# Altium PCB ALL.pcbdoc
Units mil, origin at the board's own origin, x right, y up, seen from the top; angles counter-clockwise.
Board outline 10852.5 x 10852.5 mil, 2 copper layers (Top Layer, Bottom Layer); 11 components, 199 nets, 351 pads, 0 vias.
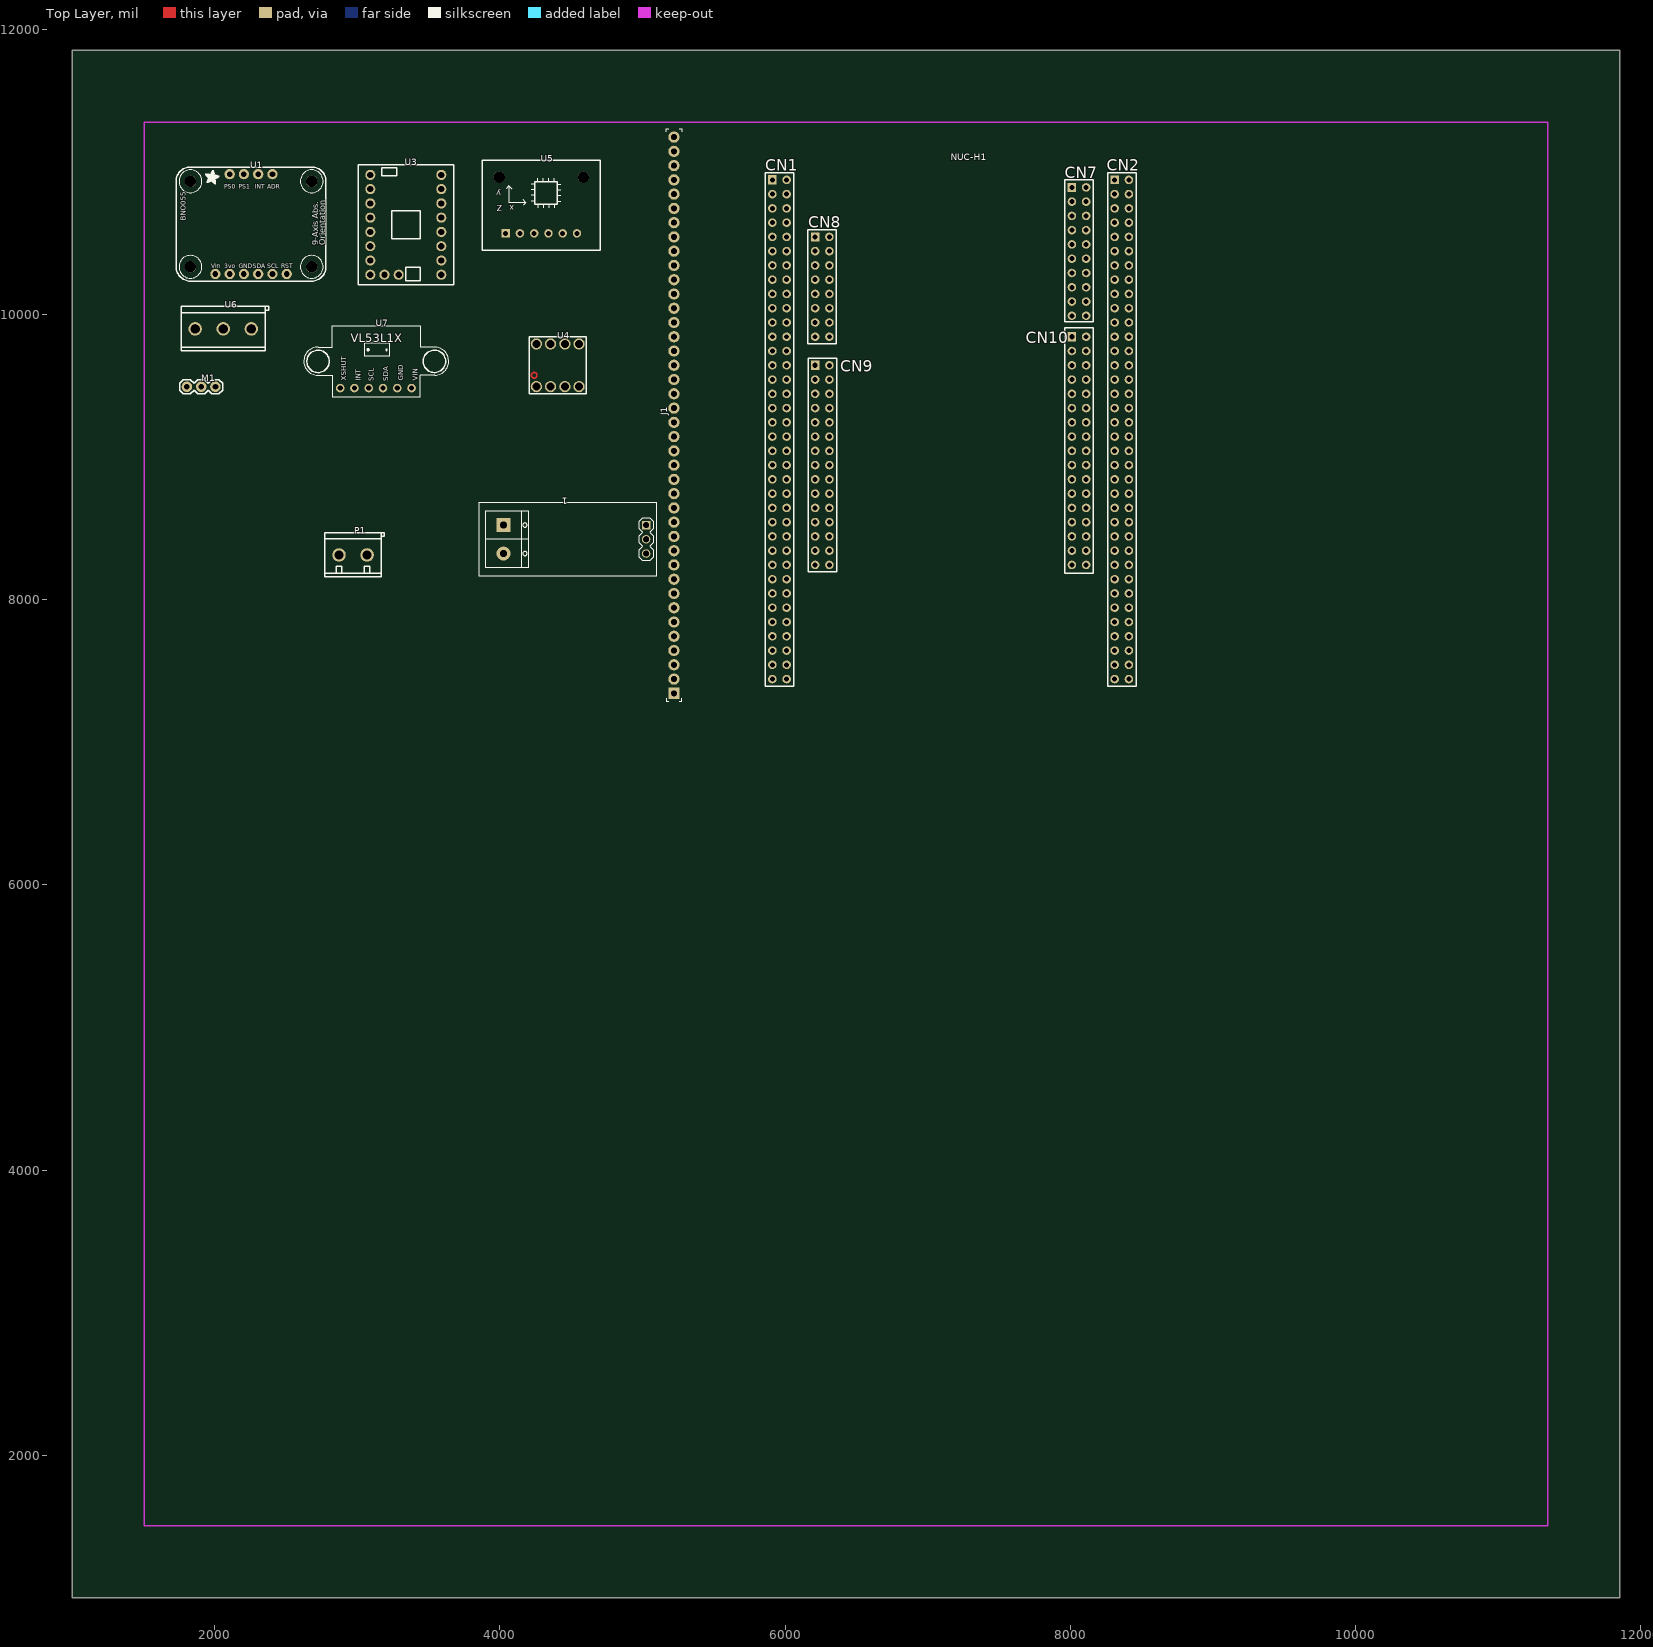
[diagram p0: Top Layer view]
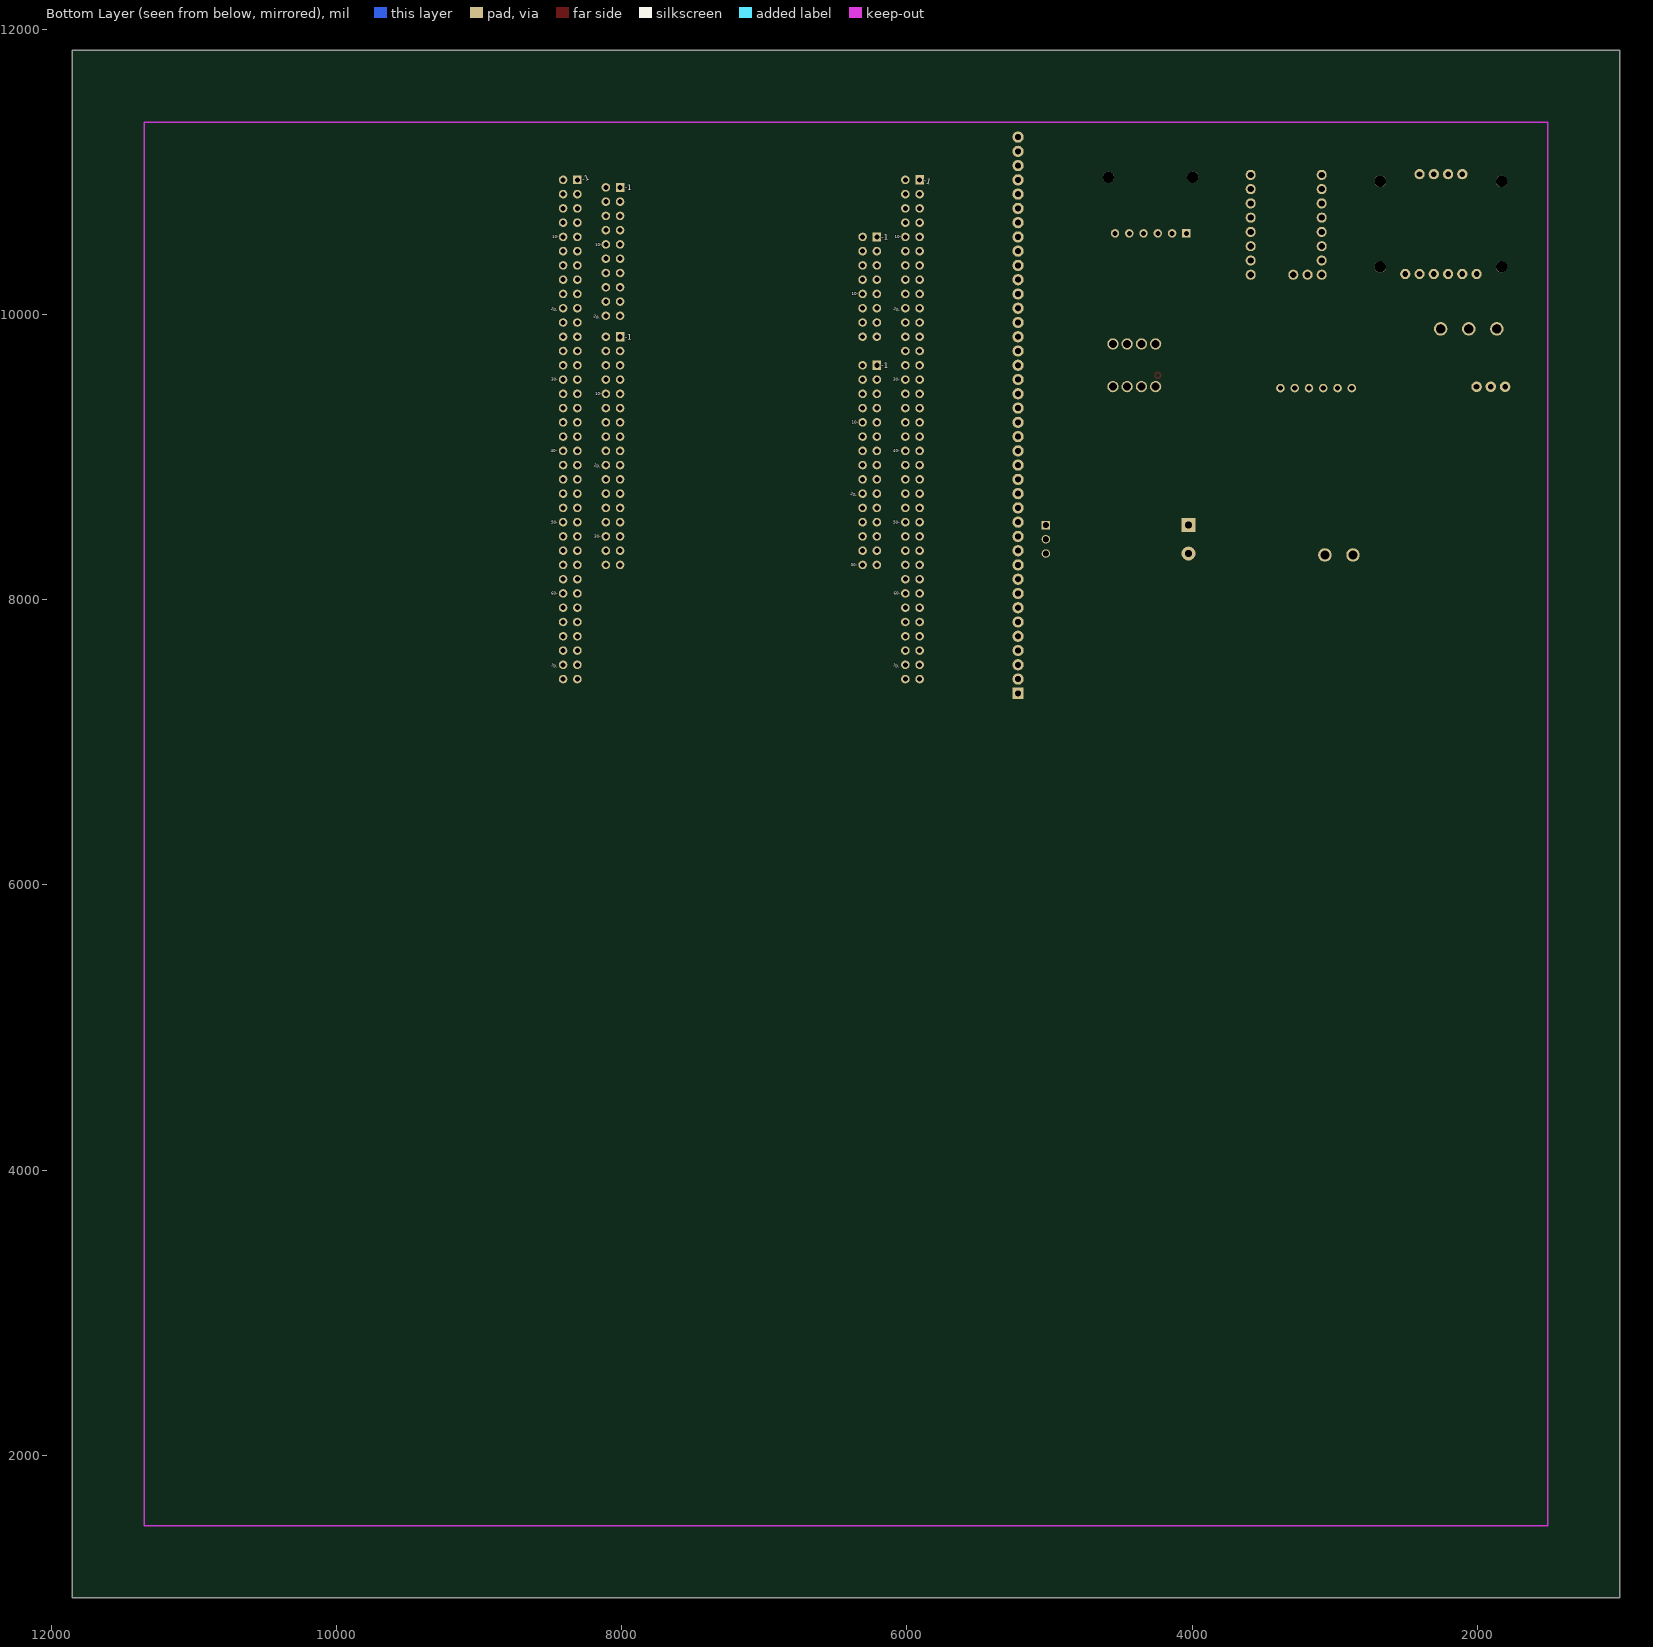
[diagram p1: Bottom Layer view, seen from below]

## Layer stack, top to bottom
Top Layer: signal copper (thickness not stored)
Dielectric: dielectric 12.6, FR-4, Dk 4.8
Bottom Layer: signal copper (thickness not stored)

## Board outline
11852.5,1000 1000,1000 1000,11852.5 11852.5,11852.5

## Components (designator, comment, footprint, x,y, rotation, side; value= is the part's Value field where it differs from the comment)
1 "CURRENT-SENSOR-ACS712#IC" CURRENT-SENSOR-ACS712#IC 4475,8422.5 r0 top
J1 "PRPC040SAAN-RC" PINHEADER_1X40_P2.54_DRILL1MM 5220,7342.5 r90 top
M1 "SMALL_SERVO" 1X03 1805,9492.5 r0 top
NUC-H1 "NUCLEO-H755ZI-ZIO" NUCLEO-H7 5910,9242.5 r0 top
P1 "KF126-5.0-2P" CONN-TH_P5.00_KF126-5.0-2P 2970,8312.5 r0 top
U1 "BNO055 MODIFIED" BNO055 2280,10727.5 r0 top
U3 "TMC2209 Socket" COMM-TH_TMC2209SILENTSTEPSTICK 3340.02,10627.5 r0 top
U4 "8 PIN DIP SOCKET" "DIP 8 PIN SOCKET" 4405,9642.5 r0 top
U5 "MPU6050-TH COPY" COMM-TH_MPU6050-TH 4290,10567.5 r0 top
U6 "Limit Switch" CONN-TH_3P-P5.00_KF126-5.0-3P 2060,9897.5 r0 top
U7 "VL53L1X_BREAKOUT COPY" VL53L1X_BREAKOUT 2880,9482.5 r0 top

## Footprints (in the part's own frame and the unit in brackets; to place one, negate y for a bottom-side part, rotate by r counter-clockwise, add the part's x,y. Pads: shape width x height; smd on the part's side, far side on the other; paste and mask are expansions set on the pad)
1X03 [mil]
  round 74 hole 40 paste+0 mask+2: 1(0,0) 2(100,0) 3(200,0)
  silkscreen extent -50,-50 250,50
BNO055 [mil]
  round 72 hole 39.36 paste+0 mask+4: 3vo(-175,-445) ADR(125,255) GND(-75,-445) INT(25,255) PS0(-175,255) PS1(-75,255) RST(225,-445) SCL(125,-445) SDA(25,-445) Vin(-275,-445)
  round 80 hole 80 unplated paste+0: ""(-450,-395) ""(-450,205) ""(400,-395) ""(400,205)
  silkscreen extent -550,-495 500,305
COMM-TH_MPU6050-TH [mm]
  rect 1.5x1.5 hole 0.9 paste+0 mask+0.05: 1(-6.35,0.001)
  round 1.5 hole 0.9 paste+0 mask+0.05: 2(-3.81,0) 3(-1.27,0) 4(1.27,0) 5(3.81,0) 6(6.35,0)
  round 2 hole 2 unplated paste+0: ""(-7.5,10) ""(7.5,10)
  silkscreen extent -10.5,-3 10.5,13
COMM-TH_TMC2209SILENTSTEPSTICK [mm]
  round 1.8 hole 1.1 paste+0 mask+0.051: 1(6.32,8.89) 2(6.32,6.35) 3(6.32,3.81) 4(6.32,1.27) 5(6.32,-1.27) 6(6.32,-3.81) 7(6.32,-6.35) 8(6.32,-8.89) 9(-6.32,8.89) 10(-6.32,6.35) 11(-6.32,3.81) 12(-6.32,1.27) 13(-6.32,-1.27) 14(-6.32,-3.81) 15(-6.32,-6.35) 16(-6.32,-8.89) 17(-3.81,-8.89) 18(-1.27,-8.89)
  silkscreen extent -8.5,-10.7 8.5,10.7
CONN-TH_3P-P5.00_KF126-5.0-3P [mm]
  round 2.4 hole 1.6 slot 1.605 at 0 deg paste+0 mask+0.051: 1(-5,0) 2(0,0) 3(5,0)
  silkscreen extent -7.5,-3.9 8.09,4
CONN-TH_P5.00_KF126-5.0-2P [mm]
  round 2.4 hole 1.6 paste+0 mask+0.102: 1(-2.5,0) 2(2.5,0)
  silkscreen extent -5,-3.9 5.59,4
CURRENT-SENSOR-ACS712#IC [mil]
  rect 59.37x59.37 hole 39.36 paste+0 mask+2: 1(550,100)
  round 59.37 hole 39.36 paste+0 mask+2: 2(550,0) 3(550,-100)
  rect 98.42x98.42 hole 47.24 slot 47.44 at 0 deg paste+0 mask+2: P1.1(-450,100)
  round 98.42 hole 47.24 slot 47.44 at 0 deg paste+0 mask+2: P1.2(-450,-100)
  silkscreen extent -620,-260 620,260
"DIP 8 PIN SOCKET" [mm]
  round 2 hole 1.4 paste+0 mask+0.102: 1(-3.81,-3.81) 2(-1.27,-3.81) 3(1.27,-3.81) 4(3.81,-3.81) 5(3.81,3.81) 6(1.27,3.81) 7(-1.27,3.81) 8(-3.81,3.81)
  Top Layer circle w0.254: c-4.191,-1.778 r0.5
  silkscreen extent -5.08,-5.08 5.08,5.08
NUCLEO-H7 [mm]
  rect 1.52x1.65 hole 0.914 paste+0 mask+0.051: 1(0,43.18) 145(7.62,33.02) 161(7.62,10.16) 191(53.34,41.834) 211(53.34,15.24)
  round 1.52 hole 0.89 paste+0 mask+0.051: 2(2.54,43.18) 3(0,40.64) 4(2.54,40.64) 5(0,38.1) 6(2.54,38.1) 7(0,35.56) 8(2.54,35.56) 9(0,33.02) 10(2.54,33.02) 11(0,30.48) 12(2.54,30.48) 13(0,27.94) 14(2.54,27.94) 15(0,25.4) 16(2.54,25.4) 17(0,22.86) 18(2.54,22.86) 19(0,20.32) 20(2.54,20.32) 21(0,17.78) 22(2.54,17.78) 23(0,15.24) 24(2.54,15.24) 25(0,12.7) 26(2.54,12.7) 27(0,10.16) 28(2.54,10.16) 29(0,7.62) 30(2.54,7.62) 31(0,5.08) 32(2.54,5.08) 33(0,2.54) 34(2.54,2.54) 35(0,0) 36(2.54,0) 37(0,-2.54) 38(2.54,-2.54) 39(0,-5.08) 40(2.54,-5.08) 41(0,-7.62) 42(2.54,-7.62) 43(0,-10.16) 44(2.54,-10.16) 45(0,-12.7) 46(2.54,-12.7) 47(0,-15.24) 48(2.54,-15.24) 49(0,-17.78) 50(2.54,-17.78) 51(0,-20.32) 52(2.54,-20.32) 53(0,-22.86) 54(2.54,-22.86) 55(0,-25.4) 56(2.54,-25.4) 57(0,-27.94) 58(2.54,-27.94) 59(0,-30.48) 60(2.54,-30.48) 61(0,-33.02) 62(2.54,-33.02) 63(0,-35.56) 64(2.54,-35.56) 65(0,-38.1) 66(2.54,-38.1) 67(0,-40.64) 68(2.54,-40.64) 69(0,-43.18) 70(2.54,-43.18) 71(0,-45.72) 72(2.54,-45.72) 74(63.5,43.18) 75(60.96,40.64) 76(63.5,40.64) 77(60.96,38.1) 78(63.5,38.1) 79(60.96,35.56) 80(63.5,35.56) 81(60.96,33.02) 82(63.5,33.02) 83(60.96,30.48) 84(63.5,30.48) 85(60.96,27.94) 86(63.5,27.94) 87(60.96,25.4) 88(63.5,25.4) 89(60.96,22.86) 90(63.5,22.86) 91(60.96,20.32) 92(63.5,20.32) 93(60.96,17.78) 94(63.5,17.78) 95(60.96,15.24) 96(63.5,15.24) 97(60.96,12.7) 98(63.5,12.7) 99(60.96,10.16) 100(63.5,10.16) 101(60.96,7.62) 102(63.5,7.62) 103(60.96,5.08) 104(63.5,5.08) 105(60.96,2.54) 106(63.5,2.54) 107(60.96,0) 108(63.5,0) 109(60.96,-2.54) 110(63.5,-2.54) 111(60.96,-5.08) 112(63.5,-5.08) 113(60.96,-7.62) 114(63.5,-7.62) 115(60.96,-10.16) 116(63.5,-10.16) 117(60.96,-12.7) 118(63.5,-12.7) 119(60.96,-15.24) 120(63.5,-15.24) 121(60.96,-17.78) 122(63.5,-17.78) 123(60.96,-20.32) 124(63.5,-20.32) 125(60.96,-22.86) 126(63.5,-22.86) 127(60.96,-25.4) 128(63.5,-25.4) 129(60.96,-27.94) 130(63.5,-27.94) 131(60.96,-30.48) 132(63.5,-30.48) 133(60.96,-33.02) 134(63.5,-33.02) 135(60.96,-35.56) 136(63.5,-35.56) 137(60.96,-38.1) 138(63.5,-38.1) 139(60.96,-40.64) 140(63.5,-40.64) 141(60.96,-43.18) 142(63.5,-43.18) 143(60.96,-45.72) 144(63.5,-45.72) 146(10.16,33.02) 147(7.62,30.48) 148(10.16,30.48) 149(7.62,27.94) 150(10.16,27.94) 151(7.62,25.4) 152(10.16,25.4) 153(7.62,22.86) 154(10.16,22.86) 155(7.62,20.32) 156(10.16,20.32) 157(7.62,17.78) 158(10.16,17.78) 159(7.62,15.24) 160(10.16,15.24) 162(10.16,10.16) 163(7.62,7.62) 164(10.16,7.62) 165(7.62,5.08) 166(10.16,5.08) 167(7.62,2.54) 168(10.16,2.54) 169(7.62,0) 170(10.16,0) 171(7.62,-2.54) 172(10.16,-2.54) 173(7.62,-5.08) 174(10.16,-5.08) 175(7.62,-7.62) 176(10.16,-7.62) 177(7.62,-10.16) 178(10.16,-10.16) 179(7.62,-12.7) 180(10.16,-12.7) 181(7.62,-15.24) 182(10.16,-15.24) 183(7.62,-17.78) 184(10.16,-17.78) 185(7.62,-20.32) 186(10.16,-20.32) 187(7.62,-22.86) 188(10.16,-22.86) 189(7.62,-25.4) 190(10.16,-25.4) 192(55.88,41.834) 193(53.34,39.294) 194(55.88,39.294) 195(53.34,36.754) 196(55.88,36.754) 197(53.34,34.214) 198(55.88,34.214) 199(53.34,31.674) 200(55.88,31.674) 201(53.34,29.134) 202(55.88,29.134) 203(53.34,26.594) 204(55.88,26.594) 205(53.34,24.054) 206(55.88,24.054) 207(53.34,21.514) 208(55.88,21.514) 209(53.34,18.974) 210(55.88,18.974) 212(55.88,15.24) 213(53.34,12.7) 214(55.88,12.7) 215(53.34,10.16) 216(55.88,10.16) 217(53.34,7.62) 218(55.88,7.62) 219(53.34,5.08) 220(55.88,5.08) 221(53.34,2.54) 222(55.88,2.54) 223(53.34,0) 224(55.88,0) 225(53.34,-2.54) 226(55.88,-2.54) 227(53.34,-5.08) 228(55.88,-5.08) 229(53.34,-7.62) 230(55.88,-7.62) 231(53.34,-10.16) 232(55.88,-10.16) 233(53.34,-12.7) 234(55.88,-12.7) 235(53.34,-15.24) 236(55.88,-15.24) 237(53.34,-17.78) 238(55.88,-17.78) 239(53.34,-20.32) 240(55.88,-20.32) 241(53.34,-22.86) 242(55.88,-22.86) 243(53.34,-25.4) 244(55.88,-25.4)
  rect 1.52x1.52 hole 0.89 paste+0 mask+0.051: 73(60.96,43.18)
  silkscreen extent -1.27,-46.99 64.77,44.45
PINHEADER_1X40_P2.54_DRILL1MM [mm]
  rect 2x2 hole 1 paste+0 mask+0.051: 1(0,0)
  round 2 hole 1 paste+0 mask+0.051: 2(2.54,0) 3(5.08,0) 4(7.62,0) 5(10.16,0) 6(12.7,0) 7(15.24,0) 8(17.78,0) 9(20.32,0) 10(22.86,0) 11(25.4,0) 12(27.94,0) 13(30.48,0) 14(33.02,0) 15(35.56,0) 16(38.1,0) 17(40.64,0) 18(43.18,0) 19(45.72,0) 20(48.26,0) 21(50.8,0) 22(53.34,0) 23(55.88,0) 24(58.42,0) 25(60.96,0) 26(63.5,0) 27(66.04,0) 28(68.58,0) 29(71.12,0) 30(73.66,0) 31(76.2,0) 32(78.74,0) 33(81.28,0) 34(83.82,0) 35(86.36,0) 36(88.9,0) 37(91.44,0) 38(93.98,0) 39(96.52,0) 40(99.06,0)
  silkscreen extent -1.4,-1.4 100.5,1.4
VL53L1X_BREAKOUT [mil]
  round 60 hole 36 paste+0 mask+4: 1(0,0) 2(100,0) 3(200,0) 4(300,0) 5(400,0) 6(500,0)
  silkscreen extent -255,-61 760,436

## Nets (pads, with @x,y where several pads share a name; then routed paths per layer and width w, separated by ;. In a path a pad name is that pad's centre, name@x,y a point inside that pad or via, vN(x,y) a via of type N, cw(c..) or ccw(c..) an arc to the next point about the centre after c; other vN are vias at no path point)
1_1: 1.1
1_2: 1.2
1_3: 1.3
1_P1.1: 1.P1.1
1_P1.2: 1.P1.2
J1_1: J1.1
J1_2: J1.2
J1_3: J1.3
J1_4: J1.4
J1_5: J1.5
J1_6: J1.6
J1_7: J1.7
J1_8: J1.8
J1_9: J1.9
J1_10: J1.10
J1_11: J1.11
J1_12: J1.12
J1_13: J1.13
J1_14: J1.14
J1_15: J1.15
J1_16: J1.16
J1_17: J1.17
J1_18: J1.18
J1_19: J1.19
J1_20: J1.20
J1_21: J1.21
J1_22: J1.22
J1_23: J1.23
J1_24: J1.24
J1_25: J1.25
J1_26: J1.26
J1_27: J1.27
J1_28: J1.28
J1_29: J1.29
J1_30: J1.30
J1_31: J1.31
J1_32: J1.32
J1_33: J1.33
J1_34: J1.34
J1_35: J1.35
J1_36: J1.36
J1_37: J1.37
J1_38: J1.38
J1_39: J1.39
J1_40: J1.40
M1_1: M1.1
M1_2: M1.2
M1_3: M1.3
NUC-H1_145: NUC-H1.145
NUC-H1_146: NUC-H1.146
NUC-H1_147: NUC-H1.147
NUC-H1_148: NUC-H1.148
NUC-H1_149: NUC-H1.149
NUC-H1_150: NUC-H1.150
NUC-H1_151: NUC-H1.151
NUC-H1_152: NUC-H1.152
NUC-H1_153: NUC-H1.153
NUC-H1_154: NUC-H1.154
NUC-H1_155: NUC-H1.155
NUC-H1_156: NUC-H1.156
NUC-H1_157: NUC-H1.157
NUC-H1_158: NUC-H1.158
NUC-H1_159: NUC-H1.159
NUC-H1_160: NUC-H1.160
NUC-H1_161: NUC-H1.161
NUC-H1_162: NUC-H1.162
NUC-H1_163: NUC-H1.163
NUC-H1_164: NUC-H1.164
NUC-H1_165: NUC-H1.165
NUC-H1_166: NUC-H1.166
NUC-H1_167: NUC-H1.167
NUC-H1_168: NUC-H1.168
NUC-H1_169: NUC-H1.169
NUC-H1_170: NUC-H1.170
NUC-H1_171: NUC-H1.171
NUC-H1_172: NUC-H1.172
NUC-H1_173: NUC-H1.173
NUC-H1_174: NUC-H1.174
NUC-H1_175: NUC-H1.175
NUC-H1_176: NUC-H1.176
NUC-H1_177: NUC-H1.177
NUC-H1_178: NUC-H1.178
NUC-H1_179: NUC-H1.179
NUC-H1_180: NUC-H1.180
NUC-H1_181: NUC-H1.181
NUC-H1_182: NUC-H1.182
NUC-H1_183: NUC-H1.183
NUC-H1_184: NUC-H1.184
NUC-H1_185: NUC-H1.185
NUC-H1_186: NUC-H1.186
NUC-H1_187: NUC-H1.187
NUC-H1_188: NUC-H1.188
NUC-H1_189: NUC-H1.189
NUC-H1_190: NUC-H1.190
NUC-H1_191: NUC-H1.191
NUC-H1_192: NUC-H1.192
NUC-H1_193: NUC-H1.193
NUC-H1_194: NUC-H1.194
NUC-H1_195: NUC-H1.195
NUC-H1_196: NUC-H1.196
NUC-H1_197: NUC-H1.197
NUC-H1_198: NUC-H1.198
NUC-H1_199: NUC-H1.199
NUC-H1_200: NUC-H1.200
NUC-H1_201: NUC-H1.201
NUC-H1_202: NUC-H1.202
NUC-H1_203: NUC-H1.203
NUC-H1_204: NUC-H1.204
NUC-H1_205: NUC-H1.205
NUC-H1_206: NUC-H1.206
NUC-H1_207: NUC-H1.207
NUC-H1_208: NUC-H1.208
NUC-H1_209: NUC-H1.209
NUC-H1_210: NUC-H1.210
NUC-H1_211: NUC-H1.211
NUC-H1_212: NUC-H1.212
NUC-H1_213: NUC-H1.213
NUC-H1_214: NUC-H1.214
NUC-H1_215: NUC-H1.215
NUC-H1_216: NUC-H1.216
NUC-H1_217: NUC-H1.217
NUC-H1_218: NUC-H1.218
NUC-H1_219: NUC-H1.219
NUC-H1_220: NUC-H1.220
NUC-H1_221: NUC-H1.221
NUC-H1_222: NUC-H1.222
NUC-H1_223: NUC-H1.223
NUC-H1_224: NUC-H1.224
NUC-H1_225: NUC-H1.225
NUC-H1_226: NUC-H1.226
NUC-H1_227: NUC-H1.227
NUC-H1_228: NUC-H1.228
NUC-H1_229: NUC-H1.229
NUC-H1_230: NUC-H1.230
NUC-H1_231: NUC-H1.231
NUC-H1_232: NUC-H1.232
NUC-H1_233: NUC-H1.233
NUC-H1_234: NUC-H1.234
NUC-H1_235: NUC-H1.235
NUC-H1_236: NUC-H1.236
NUC-H1_237: NUC-H1.237
NUC-H1_238: NUC-H1.238
NUC-H1_239: NUC-H1.239
NUC-H1_240: NUC-H1.240
NUC-H1_241: NUC-H1.241
NUC-H1_242: NUC-H1.242
NUC-H1_243: NUC-H1.243
NUC-H1_244: NUC-H1.244
P1_1: P1.1
P1_2: P1.2
U1_3vo: U1.3vo
U1_ADR: U1.ADR
U1_GND: U1.GND
U1_INT: U1.INT
U1_PS0: U1.PS0
U1_PS1: U1.PS1
U1_RST: U1.RST
U1_SCL: U1.SCL
U1_SDA: U1.SDA
U1_Vin: U1.Vin
U3_1: U3.1
U3_2: U3.2
U3_3: U3.3
U3_4: U3.4
U3_5: U3.5
U3_6: U3.6
U3_7: U3.7
U3_8: U3.8
U3_9: U3.9
U3_10: U3.10
U3_11: U3.11
U3_12: U3.12
U3_13: U3.13
U3_14: U3.14
U3_15: U3.15
U3_16: U3.16
U4_1: U4.1
U4_2: U4.2
U4_3: U4.3
U4_4: U4.4
U4_5: U4.5
U4_6: U4.6
U4_7: U4.7
U4_8: U4.8
U5_1: U5.1
U5_2: U5.2
U5_3: U5.3
U5_4: U5.4
U5_5: U5.5
U5_6: U5.6
U6_1: U6.1
U6_2: U6.2
U6_3: U6.3
U7_1: U7.1
U7_2: U7.2
U7_3: U7.3
U7_4: U7.4
U7_5: U7.5
U7_6: U7.6
pads on no net: NUC-H1.1 NUC-H1.2 NUC-H1.3 NUC-H1.4 NUC-H1.5 NUC-H1.6 NUC-H1.7 NUC-H1.8 NUC-H1.9 NUC-H1.10 NUC-H1.11 NUC-H1.12 NUC-H1.13 NUC-H1.14 NUC-H1.15 NUC-H1.16 NUC-H1.17 NUC-H1.18 NUC-H1.19 NUC-H1.20 NUC-H1.21 NUC-H1.22 NUC-H1.23 NUC-H1.24 NUC-H1.25 NUC-H1.26 NUC-H1.27 NUC-H1.28 NUC-H1.29 NUC-H1.30 NUC-H1.31 NUC-H1.32 NUC-H1.33 NUC-H1.34 NUC-H1.35 NUC-H1.36 NUC-H1.37 NUC-H1.38 NUC-H1.39 NUC-H1.40 NUC-H1.41 NUC-H1.42 NUC-H1.43 NUC-H1.44 NUC-H1.45 NUC-H1.46 NUC-H1.47 NUC-H1.48 NUC-H1.49 NUC-H1.50 NUC-H1.51 NUC-H1.52 NUC-H1.53 NUC-H1.54 NUC-H1.55 NUC-H1.56 NUC-H1.57 NUC-H1.58 NUC-H1.59 NUC-H1.60 NUC-H1.61 NUC-H1.62 NUC-H1.63 NUC-H1.64 NUC-H1.65 NUC-H1.66 NUC-H1.67 NUC-H1.68 NUC-H1.69 NUC-H1.70 NUC-H1.71 NUC-H1.72 NUC-H1.73 NUC-H1.74 NUC-H1.75 NUC-H1.76 NUC-H1.77 NUC-H1.78 NUC-H1.79 NUC-H1.80 NUC-H1.81 NUC-H1.82 NUC-H1.83 NUC-H1.84 NUC-H1.85 NUC-H1.86 NUC-H1.87 NUC-H1.88 NUC-H1.89 NUC-H1.90 NUC-H1.91 NUC-H1.92 NUC-H1.93 NUC-H1.94 NUC-H1.95 NUC-H1.96 NUC-H1.97 NUC-H1.98 NUC-H1.99 NUC-H1.100 NUC-H1.101 NUC-H1.102 NUC-H1.103 NUC-H1.104 NUC-H1.105 NUC-H1.106 NUC-H1.107 NUC-H1.108 NUC-H1.109 NUC-H1.110 NUC-H1.111 NUC-H1.112 NUC-H1.113 NUC-H1.114 NUC-H1.115 NUC-H1.116 NUC-H1.117 NUC-H1.118 NUC-H1.119 NUC-H1.120 NUC-H1.121 NUC-H1.122 NUC-H1.123 NUC-H1.124 NUC-H1.125 NUC-H1.126 NUC-H1.127 NUC-H1.128 NUC-H1.129 NUC-H1.130 NUC-H1.131 NUC-H1.132 NUC-H1.133 NUC-H1.134 NUC-H1.135 NUC-H1.136 NUC-H1.137 NUC-H1.138 NUC-H1.139 NUC-H1.140 NUC-H1.141 NUC-H1.142 NUC-H1.143 NUC-H1.144 U1. U3.17 U3.18 U5.

## Text inside footprints (layer, text, board x,y; h text height)
NUC-H1: Bottom Overlay "10-" at 6386,9232.66 h19.68; Bottom Overlay "20-" at 6397.69,8733.37 h19.68 r22; Bottom Overlay "30-" at 6394.34,8232.66 h19.68 r2; Bottom Overlay "10-" at 6386,10132.66 h19.68; Bottom Overlay "-1" at 7979,10869.82 h39.37; Bottom Overlay "-1" at 7979,9822.82 h39.37; Bottom Overlay "10-" at 8487,10532.66 h19.68; Bottom Overlay "20-" at 8497.69,10033.37 h19.68 r22; Bottom Overlay "30-" at 8494.34,9532.66 h19.68 r2; Bottom Overlay "40-" at 8495,9032.66 h19.68; Bottom Overlay "50-" at 8494.34,8532.66 h19.68 r2; Bottom Overlay "60-" at 8492,8032.66 h19.68; Bottom Overlay "70-" at 8496.69,7533.37 h19.68 r22; Bottom Overlay "-1" at 5885.76,10923.68 h39.37 r17; Bottom Overlay "-1" at 6179,10522.82 h39.37; Bottom Overlay "-1" at 6179,9622.82 h39.37; Bottom Overlay "-1" at 8268.63,10924.25 h39.37 r338; Bottom Overlay "10-" at 6086,10532.66 h19.68; Bottom Overlay "20-" at 6096.69,10033.37 h19.68 r22; Bottom Overlay "30-" at 6093.34,9532.66 h19.68 r2; Bottom Overlay "40-" at 6094,9032.66 h19.68; Bottom Overlay "50-" at 6093.34,8532.66 h19.68 r2; Bottom Overlay "60-" at 6093,8032.66 h19.68; Bottom Overlay "70-" at 6097.69,7533.37 h19.68 r22; Bottom Overlay "10-" at 8186,10478.66 h19.68; Bottom Overlay "20-" at 8196.69,9979.37 h19.68 r22; Bottom Overlay "10-" at 8184,9432.66 h19.68; Bottom Overlay "20-" at 8194.69,8933.37 h19.68 r22; Bottom Overlay "30-" at 8191.34,8432.66 h19.68 r2; Top Overlay "CN1" at 5860,11007.5 h80; Top Overlay "CN2" at 8255,11007.5 h80; Top Overlay "CN8" at 6160,10607.5 h80; Top Overlay "CN9" at 6386,9595.5 h80; Top Overlay "CN7" at 7960,10954.5 h80; Top Overlay "CN10" at 7688,9795.5 h80
U1: Top Overlay "Orientation" at 2775,10482.5 h40 r90; Top Overlay "9-Axis Abs." at 2725,10482.5 h40 r90; Top Overlay "BNO055" at 1798,10657.5 h36 r90; Top Overlay "ADR" at 2367.5,10880 h30; Top Overlay "INT" at 2280,10880 h30; Top Overlay "PS1" at 2167.5,10880 h30; Top Overlay "PS0" at 2067.5,10880 h30; Top Overlay "Vin" at 1974.27,10323.76 h30 r2; Top Overlay "3vo" at 2067.5,10323.75 h30; Top Overlay "GND" at 2167.5,10323.75 h30; Top Overlay "SDA" at 2267.5,10323.75 h30; Top Overlay "SCL" at 2367.5,10323.75 h30; Top Overlay "RST" at 2467.5,10323.75 h30
U5: Top Overlay "x" at 4099.98,10763.63 h40 r180; Top Overlay "y" at 4009.33,10866.88 h40 r177; Top Overlay "Z" at 4015.27,10766.2 h40 r180
U7: Top Overlay "XSHUT" at 2922.5,9532.5 h35 r90; Top Overlay "VIN" at 3422.5,9532.5 h35 r90; Top Overlay "GND" at 3322.5,9532.5 h35 r90; Top Overlay "SCL" at 3116.64,9529.11 h35 r90; Top Overlay "SDA" at 3216.63,9529.11 h35 r90; Top Overlay "INT" at 3022.5,9532.5 h35 r90; Top Overlay "VL53L1X" at 2955,9802.5 h60